# Altium PCB SmartCar_Groop7.PcbDoc
Units mil, origin at the board's own origin, x right, y up, seen from the top; angles counter-clockwise.
Board outline 2760 x 2165 mil, 2 copper layers (Top Layer, Bottom Layer); 23 components, 25 nets, 84 pads, 6 vias.
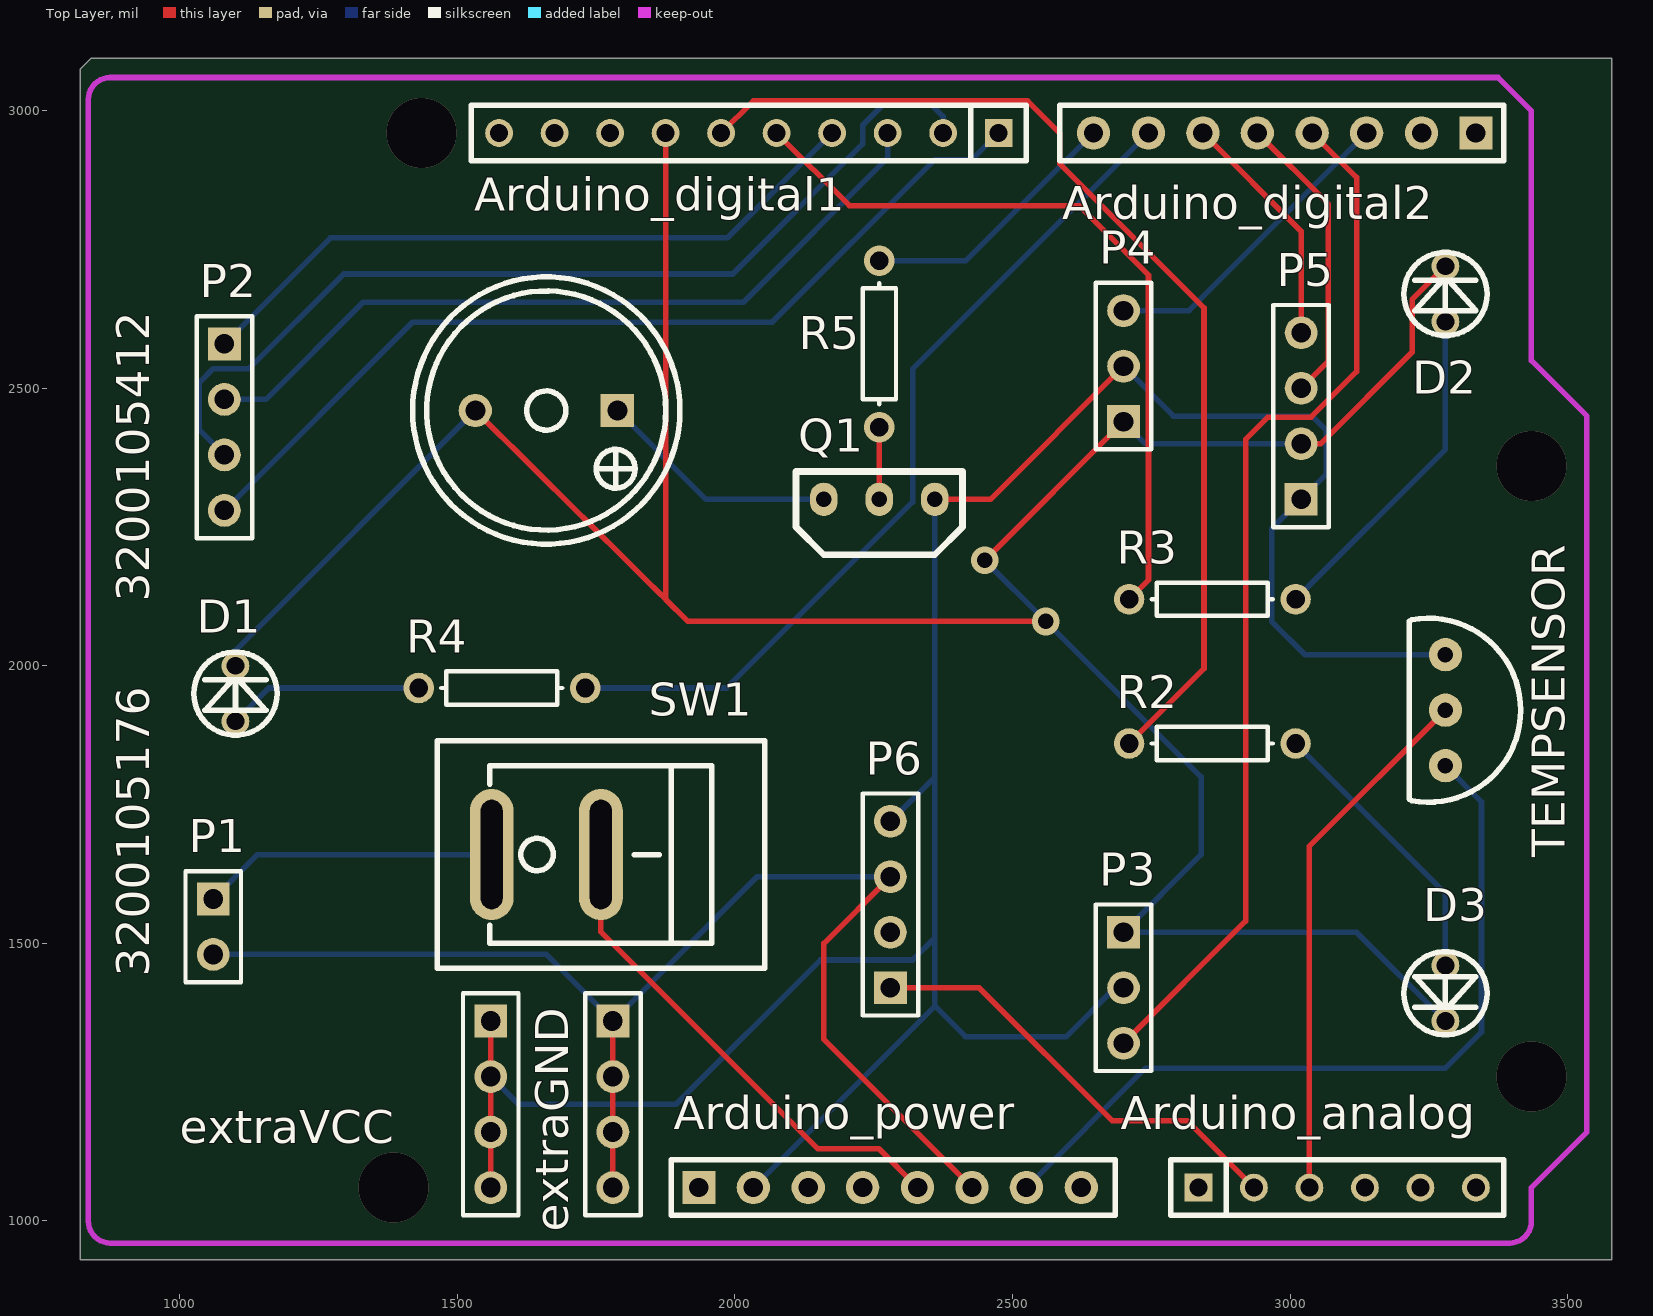
[diagram p0: Top Layer view]
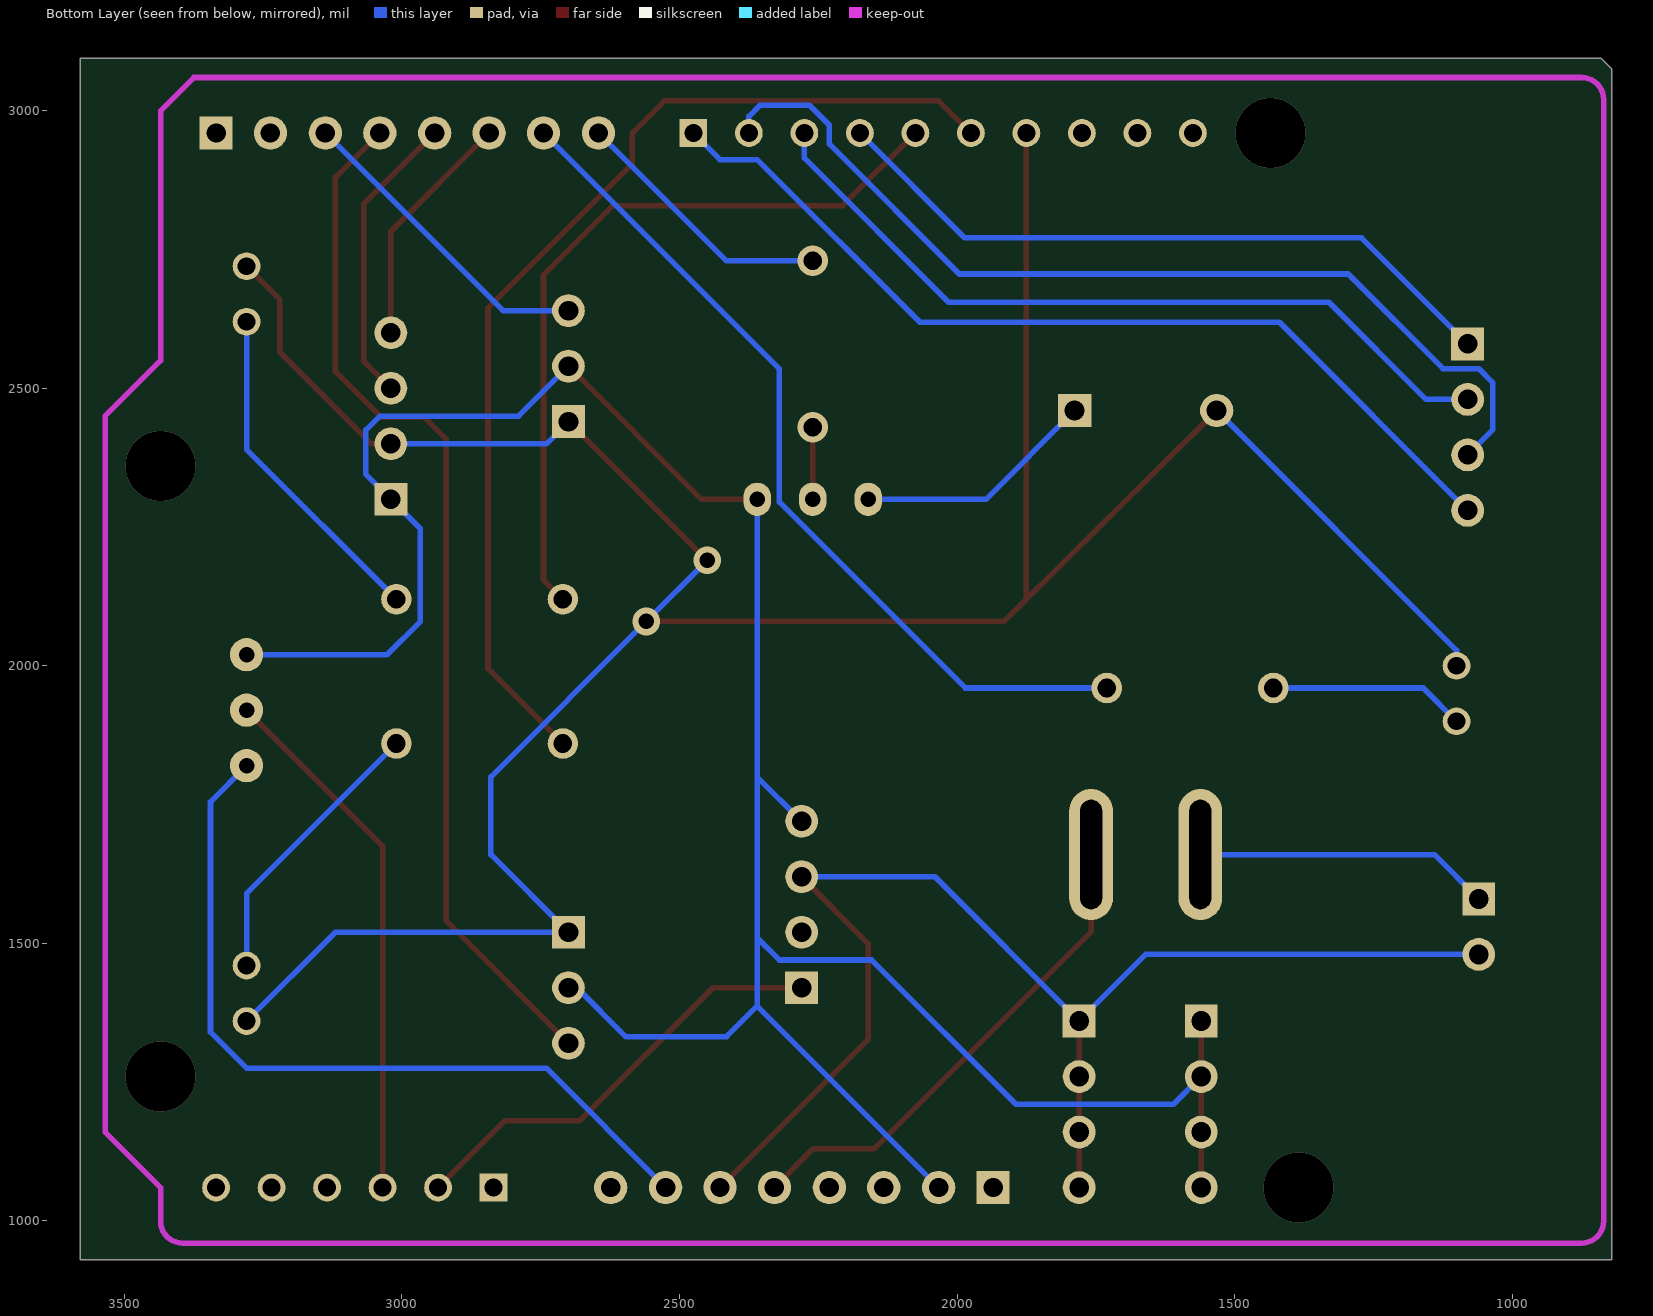
[diagram p1: Bottom Layer view, seen from below]

## Layer stack, top to bottom
Top Layer: signal copper 1.4
Dielectric: dielectric 12.6, FR-4, Dk 4.8
Bottom Layer: signal copper 1.4

## Board outline
820,3075 840,3095 3580,3095 3580,930 820,930

## Design rules (kind name [scope] priority, off if disabled: settings)
Clearance [All] p1: gap=10
PolygonConnect [All] p1: connectstyle=Relief reliefconductorwidth=10 reliefentries=4 polygonreliefangle="90 Angle"
RoutingVias [All] p1: holewidth=28 width=50 viastyle="Through Hole" minholewidth=28 minwidth=50 maxholewidth=28 maxwidth=50
SilkscreenOverComponentPads [All] p1: minsilkscreentomaskgap=10
SolderMaskExpansion [All] p1: expansion=4
TestPointUsage [All] p1: valid=0 allowmultiple=FALSE
Testpoint [All] p1: side=15 testpointundercomponent=TRUE minsize=40 maxsize=100 preferedsize=60 minholesize=0 maxholesize=40 preferedholesize=32 testpointgrid=1 style=1023 order=0123456789
Width [All] p1: maxlimit=10 minlimit=10 preferedwidth=10
23 further rules are at their usual default settings.

## Components (designator, comment, footprint, x,y, rotation, side; value= is the part's Value field where it differs from the comment)
Arduino_analog "MHDR1X6" SIP-6 2835,1060 r0 top
Arduino_digital1 "MHDR1X10" SIP-10 2475,2960 r180 top
Arduino_digital2 "MHDR1X8" SIP-8 3335,2960 r180 top
Arduino_power "MHDR1X8" SIP-8 1935,1060 r0 top
D1 "LED" LEDLXH-3 1100,1900 r180 top
D2 "LED" LEDLXH-3 3280,2620 r180 top
D3 "LED" LEDLXH-3 3280,1460 r0 top
extraGND "Header 4" HDR1X4 1780,1360 r270 top
extraVCC "Header 4" HDR1X4 1560,1360 r270 top
P1 "Header 2" HDR2X1_A 1060,1580 r270 top
P2 "Motor Control" HDR4X1_A 1080,2580 r270 top
P3 "Velocity_right" HDR3X1_A 2700,1520 r270 top
P4 "Velocity_left" HDR3X1_A 2700,2440 r90 top
P5 "BlueTooth" HDR4X1_A 3020,2300 r90 top
P6 "LightSensor" HDR4X1_A 2280,1420 r90 top
Q1 "2N3906" PNP 2360,2300 r180 top
R2 "Res1" AXIAL-0.3 2860,1860 r180 top
R3 "Res1" AXIAL-0.3 2860,2120 r180 top
R4 "Res1" AXIAL-0.3 1580,1960 r0 top
R5 "Res1" AXIAL-0.3 2260,2580 r90 top
SW1 "RS601HL-1010011BB" SW-TH_RS601HL-1010011BB 1660,1660 r0 top
TEMPSENSOR "LM35" LM35 3280,2020 r0 top
? "12085BUZZER" BUZ-TH_BD12.0-P6.50-D0.6_SEA-1285F 1660,2460 r180 top

## Footprints (in the part's own frame and the unit in brackets; to place one, negate y for a bottom-side part, rotate by r counter-clockwise, add the part's x,y. Pads: shape width x height; smd on the part's side, far side on the other; paste and mask are expansions set on the pad)
AXIAL-0.3 [mm] "Resistor; 2 Leads"
  round 1.4 hole 0.85: 1(-3.81,0) 2(3.81,0)
  silkscreen extent -2.77,-0.76 2.77,0.76
BUZ-TH_BD12.0-P6.50-D0.6_SEA-1285F [mil]
  rect 60x60 hole 36: 1(-127.95,0)
  round 60 hole 36: 2(127.95,0)
  silkscreen extent -241,-241 241,241
HDR1X4 [mm] "Connector; Header; 4 Position"
  rect 1.5x1.5 hole 0.9: 1(0,0)
  round 1.5 hole 0.9: 2(2.54,0) 3(5.08,0) 4(7.62,0)
  silkscreen extent -1.27,-1.27 8.89,1.27
HDR2X1_A [mm] "Connector; Header; 2 Position"
  rect 1.5x1.5 hole 0.9: 1(0,0)
  round 1.5 hole 0.9: 2(2.54,0)
  silkscreen extent -1.27,-1.27 3.81,1.27
HDR3X1_A [mm] "Connector; Header; 3 Position"
  rect 1.5x1.5 hole 0.9: 1(0,0)
  round 1.5 hole 0.9: 2(2.54,0) 3(5.08,0)
  silkscreen extent -1.27,-1.27 6.35,1.27
HDR4X1_A [mm] "Connector; Header; 4 Position"
  rect 1.5x1.5 hole 0.9: 1(0,0)
  round 1.5 hole 0.9: 2(2.54,0) 3(5.08,0) 4(7.62,0)
  silkscreen extent -1.27,-1.27 8.89,1.27
LEDLXH-3 [mil]
  round 50 hole 32: 1(0,0) 2(0,-100)
  silkscreen extent -75,-125 75,25
LM35 [mil]
  round 60 hole 28: 1(0,0) 2(0,-100) 3(0,-200)
  silkscreen extent -65,-266 136,66
PNP [mil]
  oval 50x60 hole 28: 1(0,0) 2(100,0) 3(200,0)
  silkscreen extent -50,-50 250,100
SIP-6 [mil]
  rect 50x50 hole 32: 1(0,0)
  round 50 hole 32: 2(100,0) 3(200,0) 4(300,0) 5(400,0) 6(500,0)
  silkscreen extent -50,-50 550,50
SIP-8 [mil]
  rect 60x60 hole 35: 1(0,0)
  round 60 hole 35: 2(98,0) 3(197,0) 4(295,0) 5(394,0) 6(492,0) 7(590,0) 8(689,0)
  silkscreen extent -50,-50 750,50
SIP-10 [mil]
  rect 50x50 hole 32: 1(0,0)
  round 50 hole 32: 2(100,0) 3(200,0) 4(300,0) 5(400,0) 6(500,0) 7(600,0) 8(700,0) 9(800,0) 10(900,0)
  silkscreen extent -50,-50 950,50
SW-TH_RS601HL-1010011BB [mm]
  oval 2x6 hole 1 slot 5 at 90 deg: 1(-2.5,0) 2(2.5,0)
  silkscreen extent -4.99,-5.21 9.99,5.21

## Part data
Arduino_analog: "Header, 6-Pin"
Arduino_digital1: "Header, 10-Pin"
Arduino_digital2 Arduino_power: "Header, 8-Pin"
extraGND extraVCC: "Header, 4-Pin"
P1: "接插件"
P2 P5 P6: library part "Header 4", "接插件"
P3 P4: library part "Header 3", "接插件"
Q1: "PNP General Purpose Amplifier"
R2 R3 R4 R5: "Resistor"
TEMPSENSOR: "LM35温度传感器"
?: "12mm*8.5mmBUZZER"

## Via types
v1: diameter 125.98, hole 125.98, Top Layer to Bottom Layer, 4 vias
v2: diameter 50, hole 28, Top Layer to Bottom Layer, 2 vias

## Nets (pads, with @x,y where several pads share a name; then routed paths per layer and width w, separated by ;. In a path a pad name is that pad's centre, name@x,y a point inside that pad or via, vN(x,y) a via of type N, cw(c..) or ccw(c..) an arc to the next point about the centre after c; other vN are vias at no path point)
GND: ?.2 Arduino_digital1.7 D1.2 D2.2 D3.2 P3.1 P4.1 P5.2 | length 5790.1
  Top Layer w10: ?.2 1915,2080 ; Arduino_digital1.7 1875,2120 1915,2080 ; v2(2450,2190) P4.1 ; v2(2560,2080) 1915,2080 ; P5.2 3055,2400 3220,2565 3220,2660 D2.2
  Bottom Layer w10: D1.2 1100,2027.95 ?.2 ; v2(2450,2190) v2(2560,2080) ; P4.1 2740,2400 P5.2 ; D3.2 3120,1520 P3.1 2840,1660 2840,1800 ; v2(2560,2080) 2840,1800 ; v2(2560,2080) 2840,1800
Net_1: ?.1 Q1.3 | length 438.3
  Bottom Layer w10: ?.1 1947.95,2300 Q1.3
NetArduino_analog_2: Arduino_analog.2 P6.1 | length 804.1
  Top Layer w10: P6.1 2440,1420 2680,1180 2815,1180 Arduino_analog.2
NetArduino_analog_3: Arduino_analog.3 TEMPSENSOR.2 | length 961.5
  Top Layer w10: Arduino_analog.3 3035,1675 TEMPSENSOR.2
NetArduino_digital1_1: Arduino_digital1.1 P2.4 | length 1676.7
  Bottom Layer w10: P2.4 1419,2619 2067,2619 2360,2912 2427,2912 Arduino_digital1.1
NetArduino_digital1_2: Arduino_digital1.2 P2.3 | length 1754.2
  Bottom Layer w10: P2.3 1035,2425 1035,2510.47 1060,2535.47 1124.53,2535.47 1295.06,2706 1996,2706 2230,2940 2230,2974 2266,3010 2355,3010 2375,2990 Arduino_digital1.2
NetArduino_digital1_3: Arduino_digital1.3 P2.2 | length 1420.2
  Bottom Layer w10: P2.2 1155,2480 1330,2655 2015,2655 2275,2915 Arduino_digital1.3
NetArduino_digital1_4: Arduino_digital1.4 P2.1 | length 1252.4
  Bottom Layer w10: P2.1 1271,2771 1986,2771 Arduino_digital1.4
NetArduino_digital1_5: Arduino_digital1.5 R3.2 | length 1374.5
  Top Layer w10: Arduino_digital1.5 2206,2829 2620,2829 2745,2704 2745,2155 R3.2
NetArduino_digital1_6: Arduino_digital1.6 R2.2 | length 1921.7
  Top Layer w10: Arduino_digital1.6 2033,3018 2527,3018 2585,2960 2585,2905 2845,2645 2845,1995 R2.2
NetArduino_digital2_3: Arduino_digital2.3 P4.3 | length 570.5
  Bottom Layer w10: P4.3 2818,2640 Arduino_digital2.3
NetArduino_digital2_4: Arduino_digital2.4 P3.3 | length 1892.8
  Top Layer w10: P3.3 2920,1540 2920,2408 2960,2448 3038,2448 3120,2530 3120,2880 Arduino_digital2.4
NetArduino_digital2_5: Arduino_digital2.5 P5.3 | length 533.3
  Top Layer w10: Arduino_digital2.5 3069,2832 3069,2549 P5.3
NetArduino_digital2_6: Arduino_digital2.6 P5.4 | length 433.3
  Top Layer w10: Arduino_digital2.6 3020,2783 P5.4
NetArduino_digital2_7: Arduino_digital2.7 R4.2 | length 1569.8
  Bottom Layer w10: R4.2 1985,1960 2320,2295 2320,2535 Arduino_digital2.7
NetArduino_digital2_8: Arduino_digital2.8 R5.2 | length 481.3
  Bottom Layer w10: R5.2 2416,2730 Arduino_digital2.8
NetArduino_power_5: Arduino_power.5 SW1.2 | length 900.8
  Top Layer w10: SW1.2 1758.42,1520.58 2149,1130 2259,1130 Arduino_power.5
NetArduino_power_6: Arduino_power.6 extraGND.1 extraGND.2 extraGND.3 extraGND.4 P1.2 P6.3 | length 2417.7
  Top Layer w10: extraGND.4 extraGND.3 extraGND.2 extraGND.1 ; P6.3@2300,1620 P6.3 2160,1500 2160,1327 Arduino_power.6
  Bottom Layer w10: P1.2 1660,1480 extraGND.1 2040,1620 P6.3
NetArduino_power_7: Arduino_power.7 TEMPSENSOR.3 | length 1442.9
  Bottom Layer w10: Arduino_power.7 2740,1275 3280,1275 3345,1340 3345,1755 TEMPSENSOR.3
NetD1_1: D1.1 R4.1 | length 354.9
  Bottom Layer w10: D1.1 1160,1960 R4.1
NetD2_1: D2.1 R3.1 | length 611.8
  Bottom Layer w10: R3.1 3280,2390 D2.1
NetD3_1: D3.1 R2.1 | length 511.8
  Bottom Layer w10: R2.1 3280,1590 D3.1
NetP1_1: P1.1 SW1.1 | length 534.7
  Bottom Layer w10: P1.1 1140,1660 SW1.1
NetQ1_2: Q1.2 R5.1 | length 130
  Top Layer w10: Q1.2 R5.1
VCC: Arduino_power.2 extraVCC.1 extraVCC.2 extraVCC.3 extraVCC.4 P3.2 P4.2 P5.1 P6.4 Q1.1 TEMPSENSOR.1 | length 4708.3
  Top Layer w10: extraVCC.4 extraVCC.3 extraVCC.2 extraVCC.1 ; Q1.1 2460,2300 P4.2
  Bottom Layer w10: extraVCC.2 1610,1210 1894,1210 2154,1470 2320,1470 2360,1510 ; Arduino_power.2 2360,1387 ; P6.4 2360,1800 ; Q1.1 2360,1800 ; P3.2 2685,1420 2597,1332 2415,1332 2360,1387 ; P4.2 2790,2450 3040,2450 3065,2425 3065,2345 P5.1 2967,2247 2967,2080 3027,2020 TEMPSENSOR.1 ; 2360,1387 2360,1510 ; 2360,1510 2360,1760 2360,1800
pads on no net: Arduino_analog.1 Arduino_analog.4 Arduino_analog.5 Arduino_analog.6 Arduino_digital1.8 Arduino_digital1.9 Arduino_digital1.10 Arduino_digital2.1 Arduino_digital2.2 Arduino_power.1 Arduino_power.3 Arduino_power.4 Arduino_power.8 P6.2
copper on no net:
  other v1: 1385,1060 3435,1260 3435,2360 1435,2960

## Keep-outs
Keep-Out Layer:
  lines w10: 835,999.37 ccw(c874.37,999.37) 874.37,960 3395.63,960 ccw(c3395.63,999.37) 3435,999.37 3435,1060 3535,1160 3535,2450 3435,2550 3435,3000 3375,3060 874.37,3060 ccw(c874.37,3020.63) 835,3020.63 835,999.37

## Silkscreen, mask and mechanical layers (free items; w line width, h text height)
Top Overlay:
  text "3200105412" at 945,2115 h60 r90
  text "3200105176" at 945,1440 h60 r90